# EAGLE board PGTN021_octasource_mkii_controls (EAGLE 9.6.0)
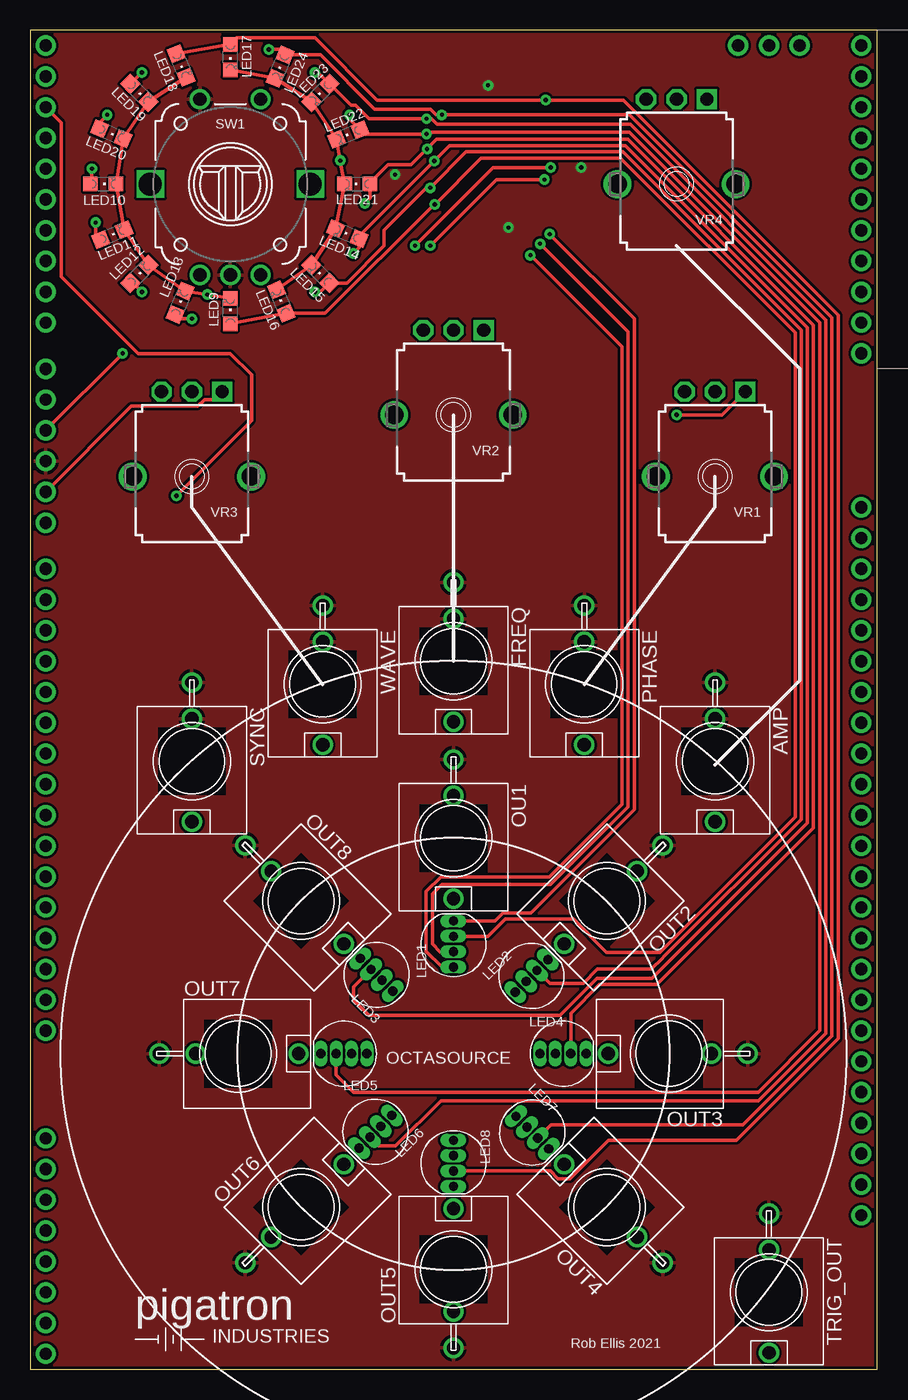
[diagram p0: board, top side]
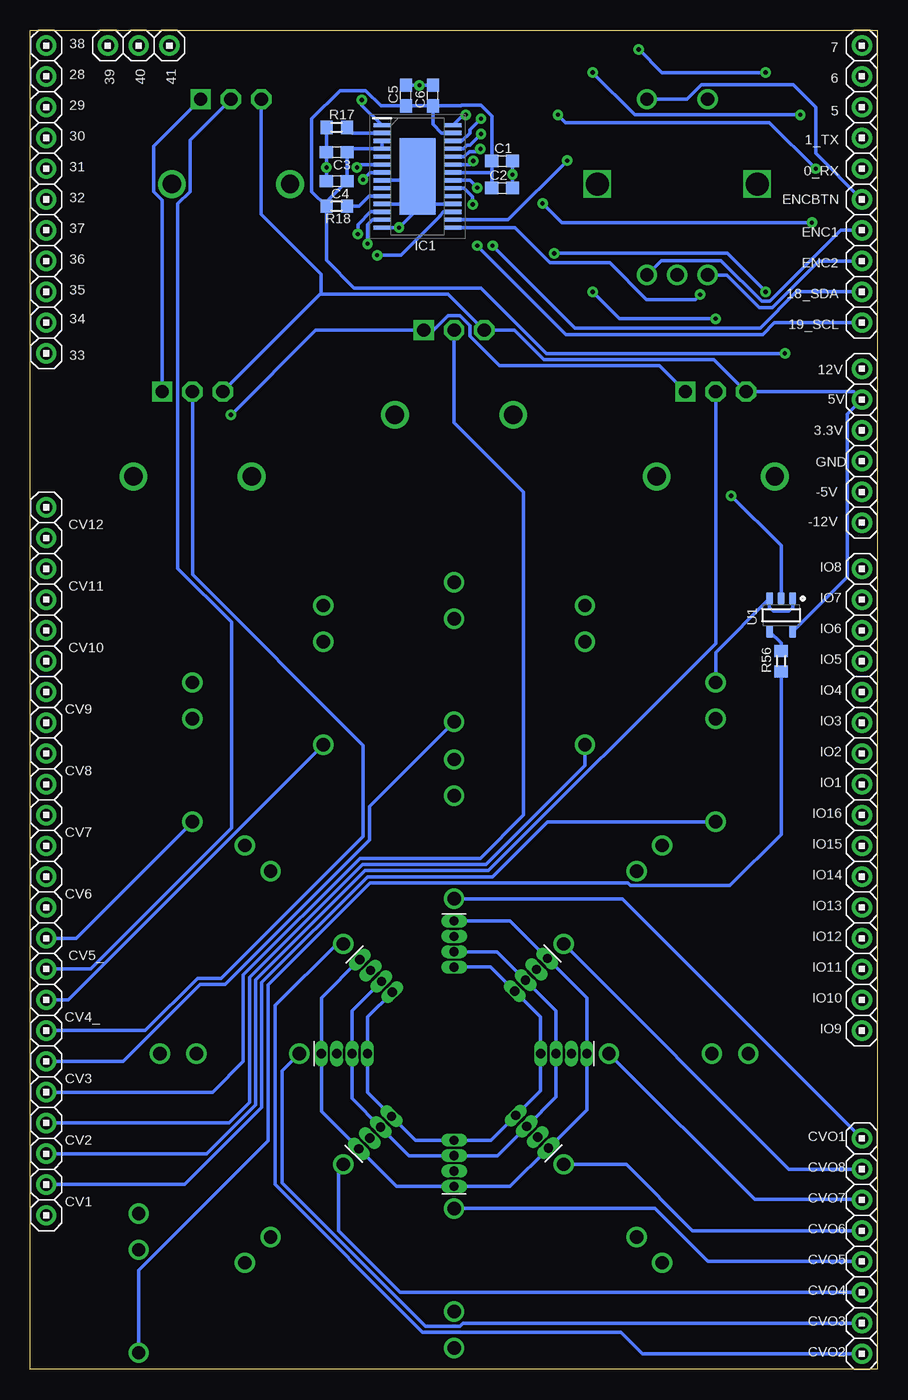
[diagram p1: board, bottom side, seen from below]

Size 69.9 x 110.48 mm. Coordinates in mm from the lower left corner, seen from the top.
Outline: 0,0 69.9,0 69.9,110.48 0,110.48 0,0
Copper layers (1*16): Top 0.0356mm / dielectric 1.5011mm / Bottom 0.0356mm
Design rules "pigatron": minimum track width 8mil, minimum drill 13mil, track to track 8mil, track to pad 8mil, pad to pad 8mil, via to via 8mil, smd to smd 6mil, copper to edge 10mil, drill to drill 10mil, minimum pad ring 6mil, minimum via ring 10mil, stop-mask expansion 4mil, vias tented up to drill 15mil, thermal gap 10mil

## Footprints (pad centres in the part's own frame; a part is rotated, then mirrored left to right if it is on the bottom)
HEADER/MALE/01 = drill 1.016 pad 1.676: 1 0,0
WQP-PJ301M-12_JACK = drill 1.1 pad 1.676: P$1 0,5; P$2 0,-3.5; P$3 0,-6.5
C0603 = smd 1.1 x 1: 1 -0.85,0; 2 0.85,0
TSSOP29 = smd 1.4 x 0.35: 1 -2.938,4.225; 2 -2.938,3.575; 3 -2.938,2.925; 4 -2.938,2.275; 5 -2.938,1.625; 6 -2.938,0.975; 7 -2.938,0.325; 8 -2.938,-0.325; 9 -2.938,-0.975; 10 -2.938,-1.625; 11 -2.938,-2.275; 12 -2.938,-2.925; 13 -2.938,-3.575; 14 -2.938,-4.225; 15 2.938,-4.225; 16 2.938,-3.575; 17 2.938,-2.925; 18 2.938,-2.275; 19 2.938,-1.625; 20 2.938,-0.975; 21 2.938,-0.325; 22 2.938,0.325; 23 2.938,0.975; 24 2.938,1.625; 25 2.938,2.275; 26 2.938,2.925; 27 2.938,3.575; 28 2.938,4.225 | smd 3 x 6.3: 29 0,0
LED-RGB-THRU = drill 0.762 pad 0.889 long: 1 1.905,0; 2 0.635,0; 3 -0.635,0; 4 -1.905,0
CHIPLED_0805 = smd 1.2 x 1.2: A 0,-1.05; C 0,1.05
R0603 = smd 1 x 1.1: 1 -0.85,0; 2 0.85,0
PEC12_INCREMENTAL_ENCODER = drill 1.1 pad 1.676: A -2.5,-7.5; B 2.5,-7.5; C 0,-7.5; P1 -2.5,7; P2 2.5,7 | drill 1.9 square: GND@1 -6.6,0; GND@2 6.6,0
74AHCT1G125 = smd 1 x 0.6: 1 -1.375,0.95; 2 -1.375,0; 3 -1.375,-0.95; 4 1.375,-0.95; 5 1.375,0.95
9MM_SNAP-IN_POT = drill 1.1 pad 1.676 square: 1 -2.5,-7 | drill 1.1 pad 1.676 octagon: 2 0,-7; 3 2.5,-7 | drill 1.524 pad 2.286: CHASSIS1 -4.881,0; CHASSIS2 4.881,0

## Placement (x,y rotation side)
0_RX  HEADER/MALE/01  [HEADER/MALE/01]  1.27,99.06 180 bottom
1_TX  HEADER/MALE/01  [HEADER/MALE/01]  1.27,101.6 180 bottom
3.3V  HEADER/MALE/01  [HEADER/MALE/01]  1.27,77.47 90 bottom
5  HEADER/MALE/01  [HEADER/MALE/01]  1.27,104.14 180 bottom
5V  HEADER/MALE/01  [HEADER/MALE/01]  1.27,80.01 180 bottom
6  HEADER/MALE/01  [HEADER/MALE/01]  1.27,106.68 180 bottom
7  HEADER/MALE/01  [HEADER/MALE/01]  1.27,109.22 180 bottom
18_SDA  HEADER/MALE/01  [HEADER/MALE/01]  1.27,88.9 180 bottom
19_SCL  HEADER/MALE/01  [HEADER/MALE/01]  1.27,86.36 180 bottom
28  HEADER/MALE/01  [HEADER/MALE/01]  68.58,106.68 0 bottom
29  HEADER/MALE/01  [HEADER/MALE/01]  68.58,104.14 0 bottom
30  HEADER/MALE/01  [HEADER/MALE/01]  68.58,101.6 0 bottom
31  HEADER/MALE/01  [HEADER/MALE/01]  68.58,99.06 0 bottom
32  HEADER/MALE/01  [HEADER/MALE/01]  68.58,96.52 0 bottom
33  HEADER/MALE/01  [HEADER/MALE/01]  68.58,83.82 0 bottom
34  HEADER/MALE/01  [HEADER/MALE/01]  68.58,86.36 0 bottom
35  HEADER/MALE/01  [HEADER/MALE/01]  68.58,88.9 0 bottom
36  HEADER/MALE/01  [HEADER/MALE/01]  68.58,91.44 0 bottom
37  HEADER/MALE/01  [HEADER/MALE/01]  68.58,93.98 0 bottom
38  HEADER/MALE/01  [HEADER/MALE/01]  68.58,109.22 0 bottom
39  HEADER/MALE/01  [HEADER/MALE/01]  63.5,109.22 270 bottom
40  HEADER/MALE/01  [HEADER/MALE/01]  60.96,109.22 270 bottom
41  HEADER/MALE/01  [HEADER/MALE/01]  58.42,109.22 270 bottom
+12V  HEADER/MALE/01  [HEADER/MALE/01]  1.27,82.55 0 bottom
-5V  HEADER/MALE/01  [HEADER/MALE/01]  1.27,72.39 0 bottom
-12V  HEADER/MALE/01  [HEADER/MALE/01]  1.27,69.85 0 bottom
AMP  WQP-PJ301M-12_JACK  [WQP-PJ301M-12_JACK]  56.52,50.16 180 top
C1  0.47uF  [C0603]  30.96,99.69 0 bottom
C2  0.1uF  [C0603]  30.96,97.47 0 bottom
C3  0.47uF  [C0603]  44.61,100.41 180 bottom
C4  0.1uF  [C0603]  44.61,98.03 180 bottom
C5  0.47uF  [C0603]  38.89,105.09 90 bottom
C6  0.1uF  [C0603]  36.67,105.09 90 bottom
CV1  HEADER/MALE/01  [HEADER/MALE/01]  68.58,15.24 0 bottom
CV1_  HEADER/MALE/01  [HEADER/MALE/01]  68.58,12.7 0 bottom
CV2  HEADER/MALE/01  [HEADER/MALE/01]  68.58,20.32 0 bottom
CV2_  HEADER/MALE/01  [HEADER/MALE/01]  68.58,17.78 0 bottom
CV3  HEADER/MALE/01  [HEADER/MALE/01]  68.58,25.4 0 bottom
CV3_  HEADER/MALE/01  [HEADER/MALE/01]  68.58,22.86 0 bottom
CV4  HEADER/MALE/01  [HEADER/MALE/01]  68.58,30.48 0 bottom
CV4_  HEADER/MALE/01  [HEADER/MALE/01]  68.58,27.94 0 bottom
CV5  HEADER/MALE/01  [HEADER/MALE/01]  68.58,35.56 180 bottom
CV5_  HEADER/MALE/01  [HEADER/MALE/01]  68.58,33.02 180 bottom
CV6  HEADER/MALE/01  [HEADER/MALE/01]  68.58,40.64 180 bottom
CV6_  HEADER/MALE/01  [HEADER/MALE/01]  68.58,38.1 180 bottom
CV7  HEADER/MALE/01  [HEADER/MALE/01]  68.58,43.18 180 bottom
CV7_  HEADER/MALE/01  [HEADER/MALE/01]  68.58,45.72 180 bottom
CV8  HEADER/MALE/01  [HEADER/MALE/01]  68.58,50.8 180 bottom
CV8_  HEADER/MALE/01  [HEADER/MALE/01]  68.58,48.26 180 bottom
CV9  HEADER/MALE/01  [HEADER/MALE/01]  68.58,53.34 180 bottom
CV9_  HEADER/MALE/01  [HEADER/MALE/01]  68.58,55.88 180 bottom
CV10  HEADER/MALE/01  [HEADER/MALE/01]  68.58,60.96 180 bottom
CV10_  HEADER/MALE/01  [HEADER/MALE/01]  68.58,58.42 180 bottom
CV11  HEADER/MALE/01  [HEADER/MALE/01]  68.58,66.04 180 bottom
CV11_  HEADER/MALE/01  [HEADER/MALE/01]  68.58,63.5 180 bottom
CV12  HEADER/MALE/01  [HEADER/MALE/01]  68.58,68.58 180 bottom
CV12_  HEADER/MALE/01  [HEADER/MALE/01]  68.58,71.12 180 bottom
CVO1  HEADER/MALE/01  [HEADER/MALE/01]  1.27,19.05 0 bottom
CVO2  HEADER/MALE/01  [HEADER/MALE/01]  1.27,1.27 0 bottom
CVO3  HEADER/MALE/01  [HEADER/MALE/01]  1.27,3.81 0 bottom
CVO4  HEADER/MALE/01  [HEADER/MALE/01]  1.27,6.35 0 bottom
CVO5  HEADER/MALE/01  [HEADER/MALE/01]  1.27,8.89 0 bottom
CVO6  HEADER/MALE/01  [HEADER/MALE/01]  1.27,11.43 0 bottom
CVO7  HEADER/MALE/01  [HEADER/MALE/01]  1.27,13.97 0 bottom
CVO8  HEADER/MALE/01  [HEADER/MALE/01]  1.27,16.51 0 bottom
ENC1  HEADER/MALE/01  [HEADER/MALE/01]  1.27,93.98 180 bottom
ENC2  HEADER/MALE/01  [HEADER/MALE/01]  1.27,91.44 180 bottom
ENCBTN  HEADER/MALE/01  [HEADER/MALE/01]  1.27,96.52 180 bottom
FREQ  WQP-PJ301M-12_JACK  [WQP-PJ301M-12_JACK]  34.92,58.42 180 top
GND9  HEADER/MALE/01  [HEADER/MALE/01]  1.27,74.93 0 bottom
IC1  IS32FL3738  [TSSOP29]  37.94,98.42 0 bottom
IO1  HEADER/MALE/01  [HEADER/MALE/01]  1.27,48.26 180 bottom
IO2  HEADER/MALE/01  [HEADER/MALE/01]  1.27,50.8 180 bottom
IO3  HEADER/MALE/01  [HEADER/MALE/01]  1.27,53.34 180 bottom
IO4  HEADER/MALE/01  [HEADER/MALE/01]  1.27,55.88 180 bottom
IO5  HEADER/MALE/01  [HEADER/MALE/01]  1.27,58.42 180 bottom
IO6  HEADER/MALE/01  [HEADER/MALE/01]  1.27,60.96 180 bottom
IO7  HEADER/MALE/01  [HEADER/MALE/01]  1.27,63.5 180 bottom
IO8  HEADER/MALE/01  [HEADER/MALE/01]  1.27,66.04 180 bottom
IO9  HEADER/MALE/01  [HEADER/MALE/01]  1.27,27.94 180 bottom
IO10  HEADER/MALE/01  [HEADER/MALE/01]  1.27,30.48 180 bottom
IO11  HEADER/MALE/01  [HEADER/MALE/01]  1.27,33.02 180 bottom
IO12  HEADER/MALE/01  [HEADER/MALE/01]  1.27,35.56 180 bottom
IO13  HEADER/MALE/01  [HEADER/MALE/01]  1.27,38.1 180 bottom
IO14  HEADER/MALE/01  [HEADER/MALE/01]  1.27,40.64 180 bottom
IO15  HEADER/MALE/01  [HEADER/MALE/01]  1.27,43.18 180 bottom
IO16  HEADER/MALE/01  [HEADER/MALE/01]  1.27,45.72 180 bottom
LED1  DIFFUSE  [LED-RGB-THRU]  34.92,35.08 90 top
LED2  DIFFUSE  [LED-RGB-THRU]  41.37,32.45 45 top
LED3  DIFFUSE  [LED-RGB-THRU]  28.57,32.54 135 top
LED4  DIFFUSE  [LED-RGB-THRU]  43.97,26.04 0 top
LED5  DIFFUSE  [LED-RGB-THRU]  25.88,26.04 180 top
LED6  DIFFUSE  [LED-RGB-THRU]  28.48,19.59 225 top
LED7  DIFFUSE  [LED-RGB-THRU]  41.43,19.53 315 top
LED8  DIFFUSE  [LED-RGB-THRU]  34.92,16.99 270 top
LED9  [CHIPLED_0805]  16.51,87.31 0 top
LED10  [CHIPLED_0805]  6.03,97.79 270 top
LED11  [CHIPLED_0805]  6.77,93.62 292.5 top
LED12  [CHIPLED_0805]  8.99,90.37 315 top
LED13  [CHIPLED_0805]  12.36,88.01 337.5 top
LED14  [CHIPLED_0805]  26.15,93.69 67.5 top
LED15  [CHIPLED_0805]  23.94,90.37 45 top
LED16  [CHIPLED_0805]  20.71,88.09 22.5 top
LED17  [CHIPLED_0805]  16.51,108.27 180 top
LED18  [CHIPLED_0805]  12.45,107.56 202.5 top
LED19  [CHIPLED_0805]  8.99,105.32 225 top
LED20  [CHIPLED_0805]  6.68,101.95 247.5 top
LED21  [CHIPLED_0805]  26.99,97.79 90 top
LED22  [CHIPLED_0805]  26.24,101.88 112.5 top
LED23  [CHIPLED_0805]  23.94,105.32 135 top
LED24  [CHIPLED_0805]  20.62,107.48 157.5 top
OU1  WQP-PJ301M-12_JACK  [WQP-PJ301M-12_JACK]  34.92,43.81 180 top
OUT2  WQP-PJ301M-12_JACK  [WQP-PJ301M-12_JACK]  47.6,38.63 135 top
OUT3  WQP-PJ301M-12_JACK  [WQP-PJ301M-12_JACK]  52.7,26.04 90 top
OUT4  WQP-PJ301M-12_JACK  [WQP-PJ301M-12_JACK]  47.6,13.37 45 top
OUT5  WQP-PJ301M-12_JACK  [WQP-PJ301M-12_JACK]  34.92,8.26 0 top
OUT6  WQP-PJ301M-12_JACK  [WQP-PJ301M-12_JACK]  22.34,13.37 315 top
OUT7  WQP-PJ301M-12_JACK  [WQP-PJ301M-12_JACK]  17.14,26.04 270 top
OUT8  WQP-PJ301M-12_JACK  [WQP-PJ301M-12_JACK]  22.34,38.63 225 top
PHASE  WQP-PJ301M-12_JACK  [WQP-PJ301M-12_JACK]  45.72,56.52 180 top
R17  20k  [R0603]  44.61,102.47 0 bottom
R18  100k  [R0603]  44.61,95.96 0 bottom
R56  1k  [R0603]  7.94,58.42 90 bottom
SW1  ENCODER_SW1-PEC12  [PEC12_INCREMENTAL_ENCODER]  16.51,97.79 0 top
SYNC  WQP-PJ301M-12_JACK  [WQP-PJ301M-12_JACK]  13.34,50.16 180 top
TRIG_OUT  WQP-PJ301M-12_JACK  [WQP-PJ301M-12_JACK]  60.96,6.35 180 top
U1  74AHCT1G125"  [74AHCT1G125]  7.94,62.23 270 bottom
U$1  [PIGATRON-LOGO]  17.53,4.06 0 top
VR1  100k  [9MM_SNAP-IN_POT]  56.52,73.66 180 top
VR2  100k  [9MM_SNAP-IN_POT]  34.92,78.74 180 top
VR3  100k  [9MM_SNAP-IN_POT]  13.34,73.66 180 top
VR4  100k  [9MM_SNAP-IN_POT]  53.34,97.79 180 top
WAVE  WQP-PJ301M-12_JACK  [WQP-PJ301M-12_JACK]  24.13,56.52 180 top

## Library data of the parts
0_RX 1_TX 3.3V 5 5V 6 7 18_SDA 19_SCL 28-41 +12V -5V -12V CV1 CV1_ CV2 CV2_ CV3 CV3_ CV4 CV4_ CV5 CV5_ CV6 CV6_ CV7 CV7_ CV8 CV8_ CV9 CV9_ CV10 CV10_ CV11 CV11_ CV12 CV12_ CVO1-CVO8 ENC1 ENC2 ENCBTN GND9 IO1-IO16 = connectors; SPICEPREFIX: X
AMP FREQ OU1 OUT2-OUT8 PHASE SW1 SYNC TRIG_OUT VR1-VR4 WAVE = controls
C1-C6 = capacitors
IC1 = ic_digital; DESCRIPTION: IC LED DRIVER 6X8 28TSSOP; HEIGHT: 1.2mm; MANUFACTURER_NAME: ISSI, Integrated Silicon Solution Inc; MANUFACTURER_PART_NUMBER: IS32FL3738-ZLA3-TR
LED1-LED8 = display_led; PROD_ID: DIO-10632
LED9-LED24 = display_led
R17 R18 R56 = resistors
U1 = ic_digital; 3_STATE_OUTPUT: Yes; BITS: 1; CIIVA_IDS: 19361320; DATASHEET_VERSION: SCLS378M; FOOTPRINT_VARIANT_NAME_0: Level C; FOOTPRINT_VARIANT_NAME_1: Level B; FOOTPRINT_VARIANT_NAME_2: Level A; F__NOM_VOLTAGEMAXMHZ: 75; ICC__NOM_VOLTAGEMAXMA: 0.01; IMPORTED: yes; IMPORTED_FROM: vault; IMPORT_TS: 1521860152; INPUT_TYPE: CMOS; LOGIC: true; MF: Texas Instruments; MPN: SN74AHCT1G125; OPERATING_TEMPERATURE_RANGEC: -40 to 125; OUTPUT_DRIVE_IOLIOHMAXMA: 8/-8; OUTPUT_TYPE: CMOS; PACKAGE: DBV0005A; PIN_0_0_1_OUTSIDE_EDGE: dot; PREFIX: U; RATING: Catalog; RELEASE_DATE: 1459324136; SCHMITT_TRIGGER: No; SUB__FAMILY: Non-Inverting Buffer/Driver; TECHNOLOGY_FAMILY: AHCT; TPD__NOM_VOLTAGEMAXNS: 6; VAULT_GUID: D4F6E077-2F5C-4B23-8C12-AA7674079390; VAULT_REVISION: 30C08C77-DC7B-43EA-A3AC-F2B0253DD8E6; VCC_MAX_V: 5.5; VCC_MIN_V: 2; VOLTAGE_NOM_V: 5
U$1 = mechanical

## Nets
3.3V: 3.3V.1 C1.1 C2.1 C3.1 C4.1 C5.1 C6.1 IC1.3 IC1.4 IC1.22 IC1.27 R18.1
+5V: 5V.1 U1.5 VR1.3 VR2.3 VR3.3 VR4.3
+12V: +12V.1
-12V: -12V.1
N$1: IC1.12 LED1.1 LED2.1 LED3.1 LED4.1 LED5.1 LED6.1 LED7.1 LED8.1
N$3: IC1.17 LED1.4 LED2.4 LED3.4 LED4.4 LED5.4 LED6.4 LED7.4 LED8.4
N$4: CVO1.1 OU1.P$1
N$6: IC1.13 LED1.3 LED2.3 LED3.3 LED4.3 LED5.3 LED6.3 LED7.3 LED8.3
N$8: CVO2.1 OUT2.P$1
N$12: CVO3.1 OUT3.P$1
N$16: CVO4.1 OUT4.P$1
N$20: CVO5.1 OUT5.P$1
N$24: CVO6.1 OUT6.P$1
N$28: CVO7.1 OUT7.P$1
N$32: CVO8.1 OUT8.P$1
N$33: IC1.10 R18.2
N$34: R56.2 U1.4
N$35: 5.1 U1.2
N$36: ENCBTN.1 SW1.P2
N$37: ENC2.1 SW1.A
N$38: ENC1.1 SW1.B
N$39: CV1.1 SYNC.P$1
N$40: -5V.1 VR1.1 VR2.1 VR3.1 VR4.1
N$41: CV2.1 WAVE.P$1
N$42: CV3.1 FREQ.P$1
N$43: CV4.1 PHASE.P$1
N$44: AMP.P$1 CV5.1
N$45: CV2_.1 VR3.2
N$46: CV3_.1 VR2.2
N$47: CV4_.1 VR1.2
N$48: CV5_.1 VR4.2
N$49: R56.1 TRIG_OUT.P$1
N$50: IC1.20 LED1.2 LED9.A LED16.A
N$51: IC1.21 LED2.2 LED13.A LED15.A
N$52: IC1.23 LED3.2 LED12.A LED14.A
N$62: IC1.16 LED14.C LED15.C LED16.C LED17.C LED21.C LED22.C LED23.C LED24.C
N$63: IC1.15 LED9.C LED10.C LED11.C LED12.C LED13.C LED18.C LED19.C LED20.C
N$65: IC1.24 LED4.2 LED11.A LED21.A
N$66: IC1.25 LED5.2 LED10.A LED22.A
N$67: IC1.26 LED6.2 LED20.A LED23.A
N$68: IC1.28 LED7.2 LED19.A LED24.A
N$69: IC1.1 LED8.2 LED17.A LED18.A
N$70: IC1.2 R17.2
PE: AMP.P$2 AMP.P$3 C1.2 C2.2 C3.2 C4.2 C5.2 C6.2 FREQ.P$2 FREQ.P$3 GND9.1 IC1.8 IC1.11 IC1.14 IC1.18 IC1.29 OU1.P$3 OUT2.P$3 OUT3.P$3 OUT4.P$3 OUT5.P$3 OUT6.P$3 OUT7.P$3 OUT8.P$3 PHASE.P$2 PHASE.P$3 R17.1 SW1.C SW1.P1 SYNC.P$2 SYNC.P$3 TRIG_OUT.P$3 U1.1 U1.3 WAVE.P$2 WAVE.P$3
SCL: 19_SCL.1 IC1.7
SDA: 18_SDA.1 IC1.6

## Tracks (layer width: path | path; a pad name or v marks a point on that pad's centre or on a via)
3.3V  (via drill 0.35)
  Top 0.305: 3.3V.1 v7.62,83.82
  Bottom 0.305: 31.81,98.74 C1.1 31.81,103.4 32.7,104.29 34.3,104.29 34.34,104.24 C6.1 | 31.81,98.74 C2.1 | IC1.22 31.81,98.75 31.81,98.74 | C6.1 C5.1 40.95,104.24 42.22,105.51 44.35,105.51 46.67,103.19 46.67,97.18 R18.1 | IC1.27 35.96,102 36.67,102.71 C6.1 | IC1.3 IC1.4 43.47,100.7 C3.1 C4.1 45.46,96.33 R18.1 | R18.1 45.46,91.5 43.18,89.22 32.7,89.22 27.3,83.82 v7.62,83.82
+5V
  Bottom 0.305: 45.97,88.7 45.91,88.77 45.91,90.36 50.84,95.29 VR4.3 | 45.97,88.7 47.18,87.5 VR1.3 | 45.97,88.7 35.44,88.7 32.48,85.74 VR2.3 29.94,85.74 27.52,83.31 13.49,83.31 VR3.3 1.92,80.66 5V.1 2.46,78.82 2.46,65.38 U1.5
N$1  (via drill 0.35)
  Top 0.305: v42.86,93.66 49.85,86.68 49.85,46.2 41.31,37.66 39,37.66 38.33,36.99 LED1.1
  Bottom 0.305: v42.86,93.66 42.86,94.46 41.82,95.5 IC1.12 | LED2.1 45.88,30.63 LED4.1 45.88,21.28 LED7.1 39.68,15.08 LED8.1 30.3,15.08 LED6.1 23.97,21.41 LED5.1 23.97,30.63 LED3.1 30.33,36.99 LED1.1
N$3  (via drill 0.35)
  Top 0.305: v41.27,91.92 48.83,84.36 48.83,46.62 42.85,40.64 33.89,40.64 32.67,39.42 32.67,34.48 33.97,33.18 LED1.4
  Bottom 0.305: LED1.4 31.9,33.18 LED3.4 27.78,29.06 LED5.4 27.78,22.99 LED6.4 31.88,18.89 LED8.4 38.1,18.89 LED7.4 42.07,22.86 LED4.4 42.07,29.06 LED2.4 | IC1.17 35.79,95.5 36.09,95.2 36.09,95.13 39.3,91.92 v41.27,91.92
N$4
  Bottom 0.305: OU1.P$1 21.59,38.81 21.04,38.81 CVO1.1
N$6  (via drill 0.35)
  Top 0.305: v42.07,92.87 49.34,85.6 49.34,46.41 42.94,40.01 33.98,40.01 33.18,39.21 33.18,35.08 33.81,34.45 LED1.3
  Bottom 0.305: IC1.13 41.67,94.85 42.07,94.46 v42.07,92.87 | LED2.3 43.34,29.58 LED4.3 43.34,22.33 LED7.3 38.63,17.62 LED8.3 31.35,17.62 LED6.3 26.51,22.46 LED5.3 26.51,29.58 LED3.3 31.38,34.45 LED1.3
N$8
  Bottom 0.305: OUT2.P$1 44.6,35.09 49.69,30 49.69,25.74 49.69,15.24 37.51,3.05 21.15,3.05 19.37,1.27 CVO2.1
N$12
  Bottom 0.305: CVO3.1 34.18,3.81 34.43,3.56 37.3,3.56 49.13,15.39 49.13,24.61 OUT3.P$1
N$16
  Bottom 0.305: OUT4.P$1 44.45,16.52 44.45,11.43 39.37,6.35 CVO4.1
N$20
  Bottom 0.305: OUT5.P$1 18.34,13.26 13.97,8.89 CVO5.1
N$24
  Bottom 0.305: OUT6.P$1 20.72,16.91 15.24,11.43 CVO6.1
N$28
  Bottom 0.305: OUT7.P$1 10.12,14.01 1.31,14.01 CVO7.1
N$32
  Bottom 0.305: OUT8.P$1 7.3,16.51 CVO8.1
N$33
  Bottom 0.305: R18.2 42.78,95.96 41.95,96.8 IC1.10
N$34
  Bottom 0.305: U1.4 7.94,59.91 R56.2
N$35  (via drill 0.35)
  Top 0.305: v12.06,72.07 18.26,78.26 18.26,82.07 16.51,83.82 8.89,83.82 2.54,90.17 2.54,102.87 5.1
  Bottom 0.305: U1.2 7.94,67.94 v12.06,72.07
N$36
  Bottom 0.305: SW1.P2 15.7,104.79 14.5,105.98 6.92,105.98 5.08,104.14 5.08,100.33 ENCBTN.1
N$37
  Bottom 0.305: SW1.A 12.43,90.29 9.74,87.61 8.67,87.61 4.84,91.44 ENC2.1
N$38
  Bottom 0.305: SW1.B 17.82,91.48 12.9,91.48 9.53,88.11 8.88,88.11 3.02,93.98 ENC1.1
N$39
  Bottom 0.305: SYNC.P$1 27.23,45.16 31.75,40.64 42.07,40.64 50.8,31.91 50.8,21.59 57.15,15.24 CV1.1
N$40  (via drill 0.35)
  Top 0.305: v53.34,78.74 57.09,78.74 VR1.1 | -5V.1 8.35,79.47 13.83,79.47 14.37,80.01 15.24,80.01 15.84,80.61 VR3.1
  Bottom 0.305: v53.34,78.74 46.34,85.74 VR2.1 36.61,85.74 35.42,86.93 34.43,86.93 33.62,86.12 33.62,85.25 31.18,82.8 17.98,82.8 VR3.1 | VR1.1 59.02,96.47 59.72,97.17 59.72,100.91 VR4.1
N$41
  Bottom 0.305: WAVE.P$1 24.13,49.8 32.28,41.66 42.49,41.66 51.82,32.33 51.82,22.01 53.51,20.32 CV2.1
N$42
  Bottom 0.305: FREQ.P$1 41.91,46.44 41.91,43.67 53.83,31.75 55.88,31.75 62.23,25.4 CV3.1
N$43
  Bottom 0.305: PHASE.P$1 66.75,30.48 CV4.1
N$44
  Bottom 0.305: AMP.P$1 66.08,35.6 66.12,35.56 CV5.1
N$45
  Bottom 0.305: VR3.2 13.34,59.88 32.07,41.15 42.28,41.15 51.31,32.12 51.31,21.8 55.33,17.78 CV2_.1
N$46
  Bottom 0.305: VR2.2 34.92,78.11 29.21,72.39 29.21,45.72 32.77,42.16 42.7,42.16 52.32,32.54 52.32,25.4 54.74,22.99 54.86,22.86 CV3_.1
N$47
  Bottom 0.305: VR1.2 56.52,65.56 42.42,51.47 42.42,43.97 54.13,32.26 56.09,32.26 60.41,27.94 CV4_.1
N$48
  Bottom 0.305: VR4.2 56.72,101.41 56.72,97.17 57.73,96.16 57.73,66.06 53.3,61.63 53.3,44.65 64.93,33.02 CV5_.1
N$49
  Bottom 0.305: R56.1 7.94,44.13 12.16,39.91 20.36,39.91 20.59,40.13 41.86,40.13 50.29,31.7 50.29,18.83 60.96,8.16 TRIG_OUT.P$1
N$50  (via drill 0.35)
  Top 0.305: LED9.A LED16.A 24.34,87.12 33.33,96.11 v33.39,96.11 37.22,99.94 48.7,99.94 63.12,85.52 63.12,45.58 51.95,34.41 47.54,34.41 44.81,37.15 39.21,37.15 37.78,35.72 LED1.2
  Bottom 0.305: IC1.20 34.09,97.45 33.39,96.75 v33.39,96.11
N$51  (via drill 0.35)
  Top 0.305: v23.5,88.9 23.95,88.9 LED15.A 26.13,89.63 29.21,92.71 29.21,93.98 32.72,97.49 v33.02,97.49 35.98,100.45 48.91,100.45 63.63,85.73 63.63,45.37 52.31,34.05 52.16,33.9 51.28,33.02 46.82,33.02 45.64,31.83 42.88,31.83 LED2.2 | v13.34,86.68 12.32,86.68 LED13.A
  Bottom 0.305: v23.5,88.9 21.27,86.68 v13.34,86.68 | v33.02,97.49 33.63,98.1 IC1.21
N$52  (via drill 0.35)
  Top 0.305: v26.67,92.08 27.12,92.52 LED14.A 27.12,93.48 v33.34,99.69 34.6,100.96 49.12,100.96 64.14,85.94 64.14,45.09 51.31,32.26 46.78,32.26 43.73,29.21 27.94,29.21 26.67,30.48 26.67,31.54 LED3.2 | v9.21,88.9 8.48,89.63 LED12.A
  Bottom 0.305: v26.67,92.08 12.38,92.08 v9.21,88.9 | IC1.23 33.63,99.4 v33.34,99.69
N$62  (via drill 0.35)
  Top 0.305: LED16.C LED15.C LED14.C LED21.C v25.59,99.73 LED22.C LED23.C LED24.C LED17.C
  Bottom 0.305: IC1.16 30.46,94.85 v25.59,99.73
N$63  (via drill 0.35)
  Top 0.305: LED18.C LED19.C LED20.C LED10.C LED11.C LED12.C LED13.C v14.62,88.67 LED9.C
  Bottom 0.305: IC1.15 29.91,94.2 27,91.29 22.07,91.29 19.05,88.27 15.03,88.27 v14.62,88.67
N$65  (via drill 0.35)
  Top 0.305: v27.62,96.2 28.04,96.62 LED21.A 28.04,97.89 29.53,99.38 31.43,99.38 v32.75,100.69 33.54,101.49 49.31,101.49 64.64,86.15 64.64,44.66 51.73,31.75 46.99,31.75 44.61,29.37 LED4.2 | v5.4,94.61 5.4,93.62 LED11.A
  Bottom 0.305: v27.62,96.2 26.04,94.61 v5.4,94.61 | IC1.24 34.09,100.05 33.66,100.48 32.97,100.48 v32.75,100.69
N$66  (via drill 0.35)
  Top 0.305: v26.35,103.5 26.35,103.14 LED22.A 27.57,101.92 v32.7,101.92 32.86,102.08 49.44,102.08 65.15,86.36 65.15,27.94 60.07,22.86 48.26,22.86 47.94,22.86 26.67,22.86 25.24,24.29 LED5.2 | v5.08,99.06 5.08,97.89 LED10.A
  Bottom 0.305: v26.35,103.5 25.72,102.87 8.89,102.87 v5.08,99.06 | IC1.25 34.16,100.7 33.87,100.99 33.63,100.99 v32.7,101.92
N$67  (via drill 0.35)
  Top 0.305: v23.5,107 23.75,107 LED23.A 26.45,104.29 26.85,104.29 27.96,103.19 v32.7,103.19 33.09,103.19 33.56,102.72 49.51,102.72 65.66,86.57 65.66,27.73 60.07,22.14 33.89,22.14 30.16,18.41 28.76,18.41 LED6.2 | v6.35,103.5 5.71,102.86 LED20.A
  Bottom 0.305: v23.5,107 20,103.5 v6.35,103.5 | v32.7,103.19 33.63,102.26 33.63,102 34.27,101.35 IC1.26
N$68  (via drill 0.35)
  Top 0.305: v19.68,108.9 20.57,108.9 LED24.A 23.95,108.45 28.43,103.97 33.03,103.97 33.49,103.5 v33.97,103.5 49.45,103.5 66.17,86.78 66.17,27.52 58.81,20.16 42.97,20.16 LED7.2 | v9.21,107 8.27,106.06 LED19.A
  Bottom 0.305: v19.68,108.9 17.78,107 v9.21,107 | IC1.28 34.15,103.5 v33.97,103.5
N$69  (via drill 0.35)
  Top 0.305: LED18.A LED17.A 17.05,109.86 23.5,109.86 28.62,104.73 v42.55,104.73 48.94,104.73 66.67,87 66.67,27.3 58.26,18.89 47.73,18.89 44.56,15.72 43.57,15.72 42.93,16.35 LED8.2
  Bottom 0.305: IC1.1 42.55,104.32 v42.55,104.73
N$70
  Bottom 0.305: R17.2 43.29,102 IC1.2
PE  (via drill 0.35)
  Bottom 0.305: C6.2 v37.78,105.94 C5.2 | C2.2 v30.11,98.58 C1.2 | R17.1 C3.2 v45.46,99.16 C4.2 | IC1.8 38.27,98.1 IC1.29 | IC1.11 39.1,96.15 37.94,97.31 | IC1.18 36.78,96.15 37.94,97.31 | 37.94,97.31 IC1.29 | IC1.14 v39.47,94.2 37.94,95.73 IC1.29 | U1.1 6.99,62.87 7.3,62.55 8.57,62.55 8.89,62.86 U1.3 13.34,59.16 SYNC.P$3
  pour Top: 69.85,110.49 0,110.49 0,0 69.85,0
SCL  (via drill 0.35)
  Top 0.305: v42.44,98.16 38.47,98.16 v33.02,92.71
  Bottom 0.305: IC1.7 41.85,98.75 v42.44,98.16 | v33.02,92.71 25.7,85.39 9.46,85.39 8.48,86.36 19_SCL.1
SDA  (via drill 0.35)
  Top 0.305: v42.94,99.16 38.2,99.16 v31.75,92.71
  Bottom 0.305: v31.75,92.71 24.93,85.89 9.67,85.89 6.66,88.9 18_SDA.1 | IC1.6 42.7,99.4 v42.94,99.16

## Text on the board
tNames: OCTASOURCE | Rob Ellis 2021
bNames: 12V | GND | -12V